# EAGLE board circuito002 (EAGLE 7.6.0)

Size 56.82 x 53.33 mm. Coordinates in mm from the lower left corner, seen from the top.
Outline: 0,0 56.82,0 56.82,53.33 0,53.33 0,0
Copper layers (1*16): Top 0.035mm / dielectric 1.5mm / Bottom 0.035mm
Design rules "default": minimum track width 10mil, minimum drill 24mil, track to track 8mil, track to pad 8mil, pad to pad 8mil, via to via 8mil, smd to smd 8mil, copper to edge 40mil, drill to drill 8mil, minimum pad ring 10mil, minimum via ring 8mil, stop-mask expansion 4mil, vias tented up to drill 0mil, thermal gap 10mil

## Footprints (pad centres in the part's own frame; a part is rotated, then mirrored left to right if it is on the bottom)
HDSP-M = drill 0.813 long: 1 -5.08,-7.62; 2 -2.54,-7.62; 3 0,-7.62; 4 2.54,-7.62; 5 5.08,-7.62; 6 5.08,7.62; 7 2.54,7.62; 8 0,7.62; 9 -2.54,7.62; 10 -5.08,7.62
2P-2.54-65/35MIL = drill 0.889 pad 1.651 square: 1 0,1.27 | drill 0.889 pad 1.651: 2 0,-1.27
0207/10 = drill 0.813 octagon: 1 -5.08,0; 2 5.08,0
M251 = drill 0.813 long: 1 -2.54,0; 2 0,0; 3 2.54,0
DIP04YL = drill 0.813 long: 1 -3.81,-3.81; 2 -1.27,-3.81; 3 1.27,-3.81; 4 3.81,-3.81; 5 3.81,3.81; 6 1.27,3.81; 7 -1.27,3.81; 8 -3.81,3.81
DIL14 = drill 0.813 long: 1 -7.62,-3.81; 2 -5.08,-3.81; 3 -2.54,-3.81; 4 0,-3.81; 5 2.54,-3.81; 6 5.08,-3.81; 7 7.62,-3.81; 8 7.62,3.81; 9 5.08,3.81; 10 2.54,3.81; 11 0,3.81; 12 -2.54,3.81; 13 -5.08,3.81; 14 -7.62,3.81

## Placement (x,y rotation side)
Digit1  [HDSP-M]  5,35.48 0 top
P1  5V  [2P-2.54-65/35MIL]  5,10.08 0 top
R1  300‎Ω  [0207/10]  5,48.18 0 top
R2  300‎Ω  [0207/10]  5,60.88 0 top  (outside the outline)
R3  300‎Ω  [0207/10]  5,86.28 0 top  (outside the outline)
R4  300‎Ω  [0207/10]  5,98.98 0 top  (outside the outline)
R5  300‎Ω  [0207/10]  5,111.68 0 top  (outside the outline)
R6  300‎Ω  [0207/10]  5,124.38 0 top  (outside the outline)
R7  300‎Ω  [0207/10]  5,175.18 0 top  (outside the outline)
S1  [M251]  5,137.08 0 top  (outside the outline)
SW1  [DIP04YL]  5,22.78 0 top
U1  [DIL14]  5,149.78 0 top  (outside the outline)
U2  [DIL14]  5,73.58 0 top  (outside the outline)
U3  [DIL14]  5,162.48 0 top  (outside the outline)

## Library data of the parts
Digit1 P1 R1-R7 S1 SW1 U1-U3 = AUTODESK_CIRCUITS_BREADBOARD

## Nets
N$1: SW1.7 U1.2 U2.1 U3.2 U3.12
N$2: Digit1.7 R1.1
N$3: Digit1.6 R2.1
N$4: Digit1.8 P1.1 S1.1 U2.7 U3.7
N$5: P1.2 S1.3 SW1.1 SW1.2 U1.14 U2.14 U3.14
N$6: Digit1.4 R3.2
N$7: R6.2 U1.3
N$8: SW1.8 U1.1 U1.12 U2.3 U3.4 U3.13
N$9: U2.4 U3.1
N$10: R5.1 U1.4 U3.3
N$11: U1.5 U3.6
N$12: R1.2 R4.1 U1.6
N$13: R3.1 U1.11
N$14: U1.13 U2.2 U3.5
N$15: Digit1.2 R4.2
N$16: Digit1.9 R7.1
N$17: Digit1.10 R6.1
N$18: Digit1.1 R5.2
N$19: R2.2 S1.2
N$20: R7.2 U3.11

## Tracks (layer width: path | path; a pad name or v marks a point on that pad's centre or on a via)
N$1  (4 unrouted)
N$2  (1 unrouted)
N$3  (1 unrouted)
N$4  (4 unrouted)
N$5  (6 unrouted)
N$6  (1 unrouted)
N$7  (1 unrouted)
N$8  (5 unrouted)
N$9  (1 unrouted)
N$10  (2 unrouted)
N$11  (1 unrouted)
N$12  (2 unrouted)
N$13  (1 unrouted)
N$14  (2 unrouted)
N$15  (1 unrouted)
N$16  (1 unrouted)
N$17  (1 unrouted)
N$18  (1 unrouted)
N$19  (1 unrouted)
N$20  (1 unrouted)